# Altium PCB wacky-hat.PcbDoc (part 2 of 2)
Units mm, origin at the board's own origin, x right, y up, seen from the top; angles counter-clockwise.
Board outline 64 x 85 mm, 4 copper layers (Top Layer, Ground Plane, Power Plane, Bottom Layer), stack 0.844 mm thick; 113 components, 70 nets, 320 pads, 108 vias.
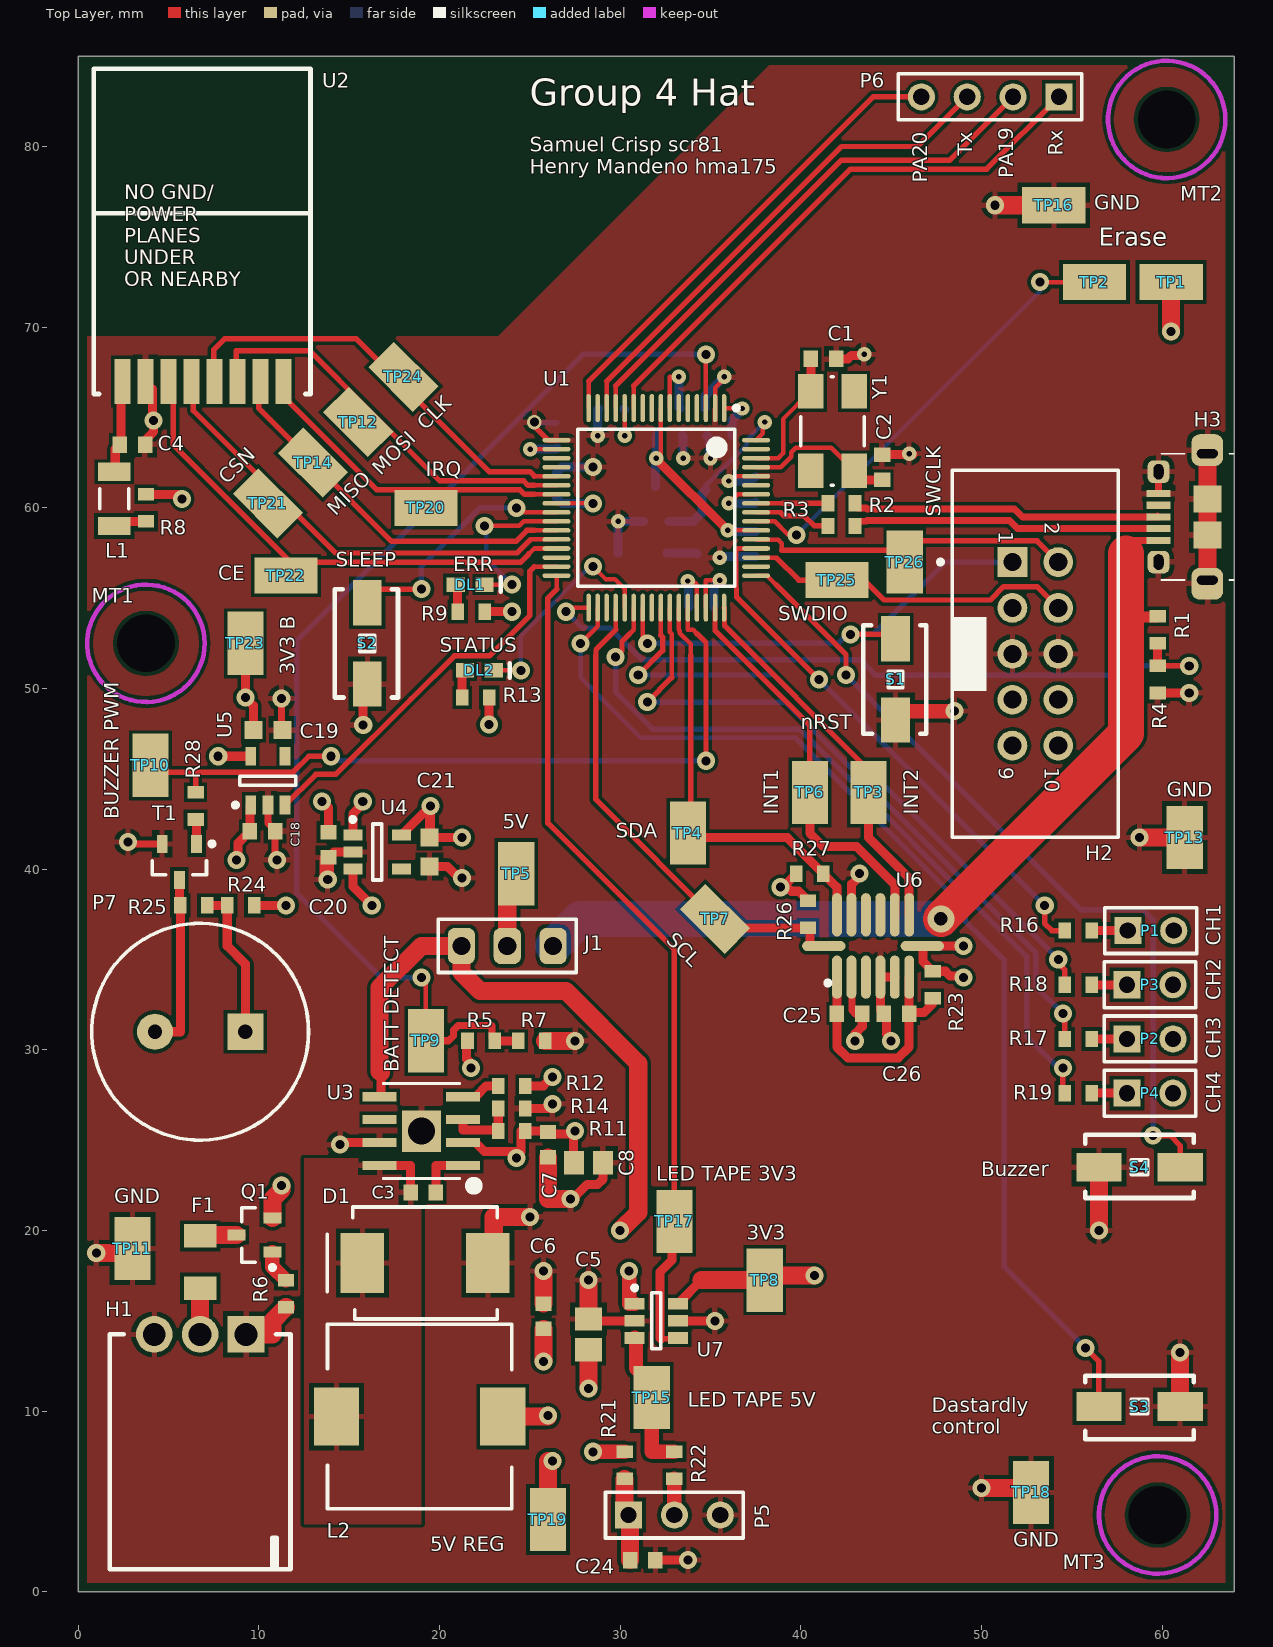
[diagram p0: Top Layer view]

## Via types
v1: diameter 1, hole 0.5, Top Layer to Bottom Layer, 82 vias
v2: diameter 0.8, hole 0.3, Top Layer to Bottom Layer, tented top, 15 vias
v3: diameter 1, hole 0.5, Top Layer to Bottom Layer, tented top, 4 vias
v4: diameter 0.8, hole 0.3, Top Layer to Bottom Layer, 4 vias
v5: diameter 0.8, hole 0.5, Top Layer to Bottom Layer, tented top, 1 vias
v6: diameter 1.5, hole 0.75, Top Layer to Bottom Layer, 1 vias
v7: diameter 2, hole 1.5, Top Layer to Bottom Layer, 1 vias

## Nets (pads, with @x,y where several pads share a name; then routed paths per layer and width w, separated by ;. In a path a pad name is that pad's centre, name@x,y a point inside that pad or via, vN(x,y) a via of type N, cw(c..) or ccw(c..) an arc to the next point about the centre after c; other vN are vias at no path point) (continued)
RADIO_CSN: (continued)
  Top Layer w0.3: U2.4@6,67.25 6.375,66.875 6.375,65.375 14.25,57.5 24.293,57.5 24.818,58.025 24.821,58.025 25.046,58.25
RADIO_IRQ: TP20.1 U1.23 U2.8 | length 18.6
  Top Layer w0.25: 25.25,60.75 U1.23
  Top Layer w0.3: U2.8@11.086,67.25 11.346,66.989 11.346,66.189 16.536,61 24.452,61 24.702,60.75 25.25,60.75
RADIO_MISO: TP14.1 U1.27 U2.7 | length 21.6
  Top Layer w0.25: 25.239,58.75 U1.27
  Top Layer w0.3: U2.7@9.814,67.25 10,67.064 10,65.5 TP14.1 17.35,58.15 24.236,58.15 24.611,58.525 24.614,58.525 24.839,58.75 25.239,58.75
RADIO_MOSI: TP12.1 U1.22 U2.6 | length 22.3
  Top Layer w0.25: 25.25,61.25 U1.22
  Top Layer w0.3: U2.6@8.543,67.25 8.75,67.457 8.75,68.7 12.8,68.7 16.125,65.375 20,61.5 24.659,61.5 24.909,61.25 25.25,61.25
RADIO_PWR_EN: U1.31 U5.3 | length 21.9
  Top Layer w0.25: 25.25,56.75 U1.31
  Top Layer w0.3: U5.3 13.15,45.25 14.255,45.25 18.438,49.432 20.818,51.813 22.765,51.813 25,54.048 25,56.5 25.25,56.75
SLEEP: S2.2 U1.25 | length 13.5
  Top Layer w0.25: v1(24.25,60) 24.453,60 24.703,59.75 U1.25
  Top Layer w0.3: S2.2 16.75,55.5 v1(19,55.5)
  Bottom Layer w0.3: v1(19,55.5) 19,56.75 22.25,60 v1(24.25,60)
SOUND_BUZZER: S4.2 U1.49 | length 45.4
  Top Layer w0.25: U1.49 38.125,56.25 38.625,55.75
  Top Layer w0.3: 38.625,55.75 42.5,51.875 v1(42.5,50.75) ; v1(59.5,25.25) 60.45,25.25 61,24.7 S4.2
  Bottom Layer w0.3: v1(42.5,50.75) 55.503,37.747 58.947,37.747 59.5,37.195 v1(59.5,25.25)
STAT0: DL1.1 U1.26 | length 9.4
  Top Layer w0.25: DL1.1 v1(24,55.75) ; v1(22.5,59) 24.417,59 24.667,59.25 U1.26
  Bottom Layer w0.25: v1(22.5,59) 22.575,58.925 22.575,57.175 v1(24,55.75)
STAT1: DL2.1 U1.37 | length 12.3
  Top Layer w0.25: DL2.1 v1(24.5,51) ; v3(28.5,56.75) 29.191,56.058 29.702,56.058 30.25,55.51 U1.37
  Bottom Layer w0.25: v1(24.5,51) 24.5,52.917 28.333,56.75 v3(28.5,56.75)
SWCLK: H2.2 TP26.1 U1.53 | length 17.9
  Top Layer w0.25: U1.53@37.55,58.225 38.75,58.225 38.947,58.028 38.947,57.65
  Top Layer w0.3: 38.947,57.65 45.541,57.65 46.066,58.175 53.075,58.175 H2.2
SWDIO: H2.4 TP25.1 U1.51 | length 18.5
  Top Layer w0.25: U1.51 37.55,57.225 38.665,57.225
  Top Layer w0.3: 38.665,57.225 39.89,56 TP25.1 43.505,56 44.605,54.9 50.488,54.9 51.223,55.635 53.075,55.635 H2.4
USB_DETECT: R1.1 R4.2 U1.33 | length 40.5
  Top Layer w0.25: v3(27,54.25) 27.225,54.475 U1.33
  Top Layer w0.3: R4.2 v1(61.5,51.25)
  Top Layer w0.5: R4.2 R1.1
  Bottom Layer w0.3: v3(27,54.25) 27.9,53.35 29.448,53.35 31.198,51.6 43.27,51.6 44.125,50.745 57.556,50.745 58.061,51.25 v1(61.5,51.25)
VBUS: H3.1 J1.3 R1.2 | length 51.5
  Top Layer w0.4: 58.25,58 58.45,58.2 H3.1
  Top Layer w0.6: 58,53.25 58.1,53.35 58.7,53.95 59.7,53.95 R1.2 ; 58.25,56.5 58.25,58
  Top Layer w2: v6(47.75,37.25) 58,47.5 58,53.25 ; 58,53.45 58,57.475
  Bottom Layer w2: J1.3 27.79,37.25 v6(47.75,37.25)
pads on no net: H2.3 H2.9 H2.10 H3.4 MT1.1 MT2.1 MT3.1 U1.4 U1.5 U1.6 U1.9 U1.10 U1.15 U1.19 U1.20 U1.30 U1.35 U1.40 U1.50 U1.59 U1.63 U3.6 U4.4 U5.4 U6.3 U6.10 U6.11 Y1.2 Y1.4

## Polygon pours and split planes (outlines as drawn)
GND on Top Layer (solid, pour order 10): 0,85 64,85 64,0 0,0
no net on Top Layer "Top Layer-No Net" (solid, pour order 6): 31,6
no net on Top Layer "Top Layer-No Net 1" (solid, pour order 4): 31,6.25
NetC3_2 on Top Layer "Top Layer-NetC3_2" (solid, pour order 0): 12.5,3.75 19,3.75 19,24 12.5,24
NetC10_2 on Bottom Layer "Bottom Layer-NetC10_2" (solid, pour order 8): 26,64.75 26,58.25 38,58.25 38,65.75 37.5,66.25 27,66.25
GND on Ground Plane (split plane): 63.49,0.51 0.51,0.51 0.51,69.5 23.25,69.5 38.24,84.49 63.49,84.49
5V on Power Plane (split plane): 16.621,44.75 16.621,43.5 16.63,43.45 16.641,43.435 16.63,43.42 16.621,43.371 16.621,39.5 16.63,39.45 16.658,39.408 18.158,37.908 18.2,37.88 18.25,37.871 25.121,37.871 25.121,31.379 24.5,31.379 21,31.379 20.95,31.37 20.908,31.342 19.446,29.879 0.51,29.879 0.51,44.871 16.621,44.871
3V3_B on Power Plane (split plane): 16.621,44.129 0.51,44.129 0.51,68.5 16.621,68.5
3V3 on Power Plane (split plane): 63.49,0.51 35.963,0.51 35.95,0.52 35.9,0.529 35.85,0.52 35.837,0.51 32.129,0.51 32.129,21.25 32.12,21.3 32.092,21.342 32.05,21.37 32,21.379 30.129,21.379 30.129,27 30.129,28.75 30.12,28.8 30.092,28.842 30.05,28.87 30,28.879 27.554,28.879 25.379,31.054 25.379,38 25.37,38.05 25.342,38.092 25.3,38.12 25.25,38.129 18.304,38.129 16.879,39.554 16.879,43.371 16.87,43.42 16.859,43.435 16.87,43.45 16.879,43.5 16.879,44.75 16.879,69.5 23.25,69.5 38.24,84.49 63.49,84.49
BATTERY_IN on Power Plane (split plane): 24.5,31.121 25.121,31.121 25.121,31 25.13,30.95 25.158,30.908 27.408,28.658 27.45,28.63 27.5,28.621 29.871,28.621 29.871,27 29.871,21.379 27,21.379 26.95,21.37 26.908,21.342 11.908,6.342 11.88,6.3 11.871,6.25 11.871,0.51 0.51,0.51 0.51,29.621 19.5,29.621 19.55,29.63 19.592,29.658 21.054,31.121 24.5,31.121
5V_REG on Power Plane (split plane): 31.871,0.51 12.129,0.51 12.129,6.196 27.054,21.121 31.871,21.121

## Other copper
Top Layer:
  pour cut-out: 0,85 0,69.5 23.25,69.5 38.75,85
Bottom Layer:
  pour cut-out: 0,85 0,69.5 23.25,69.5 38.75,85
Ground Plane (plane layer: these items are gaps in the copper):
  pour cut-out: 0,85 0,69.5 23.25,69.5 38.75,85
Power Plane (plane layer: these items are gaps in the copper):
  pour cut-out: 0,85 0,69.5 23.25,69.5 38.75,85
  lines w0.254: 0,45 16.75,45 ; 0,47.75 0.25,48 ; 0,54.25 0,54.5 ; 16.75,43.371 16.75,39.5 18.25,38 25.25,38 25.25,31 27.5,28.75 30,28.75 30,27 30,21.25 ; 16.75,43.5 16.75,44.75 16.75,69.5 ; 25.25,31.25 24.5,31.25 ; 28.25,0 32,0 32,21.25 30,21.25 ; 35.9,0.4 36.3,0 64,0 ; 41,85 64,85 64,33.5 64,29.75 ; 24.5,31.25 24.5,31.25 ; 24.5,31.25 21,31.25 19.5,29.75 0,29.75 0,0 12,0 12,6.25 27,21.25 29,21.25 30,21.25

## Silkscreen, mask and mechanical layers (free items; w line width, h text height)
Top Overlay:
  text "Group 4 Hat" at 25,82.25 h1.5
  text "Tx" at 49.5,79.5 h0.8 r90
  text "Rx" at 54.5,79.5 h0.8 r90
  text "Samuel Crisp scr81 / Henry Mandeno hma175" at 25,78.5 h0.8
  text "PA19" at 51.75,78.25 h0.8 r90
  text "PA20" at 47,78 h0.8 r90
  text "GND" at 56.25,76.5 h0.8
  text "Erase" at 56.5,74.5 h1
  text "CLK" at 19.25,64.25 h0.8 r45
  text "MOSI" at 16.75,61.75 h0.8 r45
  text "IRQ" at 19.25,61.75 h0.8
  text "CSN" at 8.25,61.25 h0.8 r45
  text "MISO" at 14.25,59.5 h0.8 r45
  text "SWCLK" at 47.75,59.5 h0.8 r90
  text "SLEEP" at 14.25,56.75 h0.8
  text "ERR" at 20.75,56.5 h0.8
  text "CE" at 7.75,56 h0.8
  text "SWDIO" at 38.75,53.75 h0.8
  text "STATUS" at 20,52 h0.8
  text "3V3 B" at 12,50.75 h0.8 r90
  text "nRST" at 40,47.75 h0.8
  text "GND" at 60.25,44 h0.8
  text "INT1" at 38.75,43 h0.8 r90
  text "INT2" at 46.5,43 h0.8 r90
  text "BUZZER PWM" at 2.25,42.75 h0.8 r90
  text "5V" at 23.5,42.25 h0.8
  text "SDA" at 29.75,41.75 h0.8
  text "SCL" at 32.5,36 h0.8 r315
  text "CH1" at 63.25,35.75 h0.8 r90
  text "CH2" at 63.25,32.75 h0.8 r90
  text "CH3" at 63.25,29.5 h0.8 r90
  text "BATT DETECT" at 17.75,28.75 h0.8 r90
  text "CH4" at 63.25,26.5 h0.8 r90
  text "Buzzer" at 50,23 h0.8
  text "LED TAPE 3V3" at 32,22.75 h0.8
  text "GND" at 2,21.5 h0.8
  text "3V3" at 37,19.5 h0.8
  text "LED TAPE 5V" at 33.75,10.25 h0.8
  text "Dastardly  / control" at 47.25,8.75 h0.8
  text "GND" at 51.75,2.5 h0.8
  text "5V REG" at 19.5,2.25 h0.8
Bottom Overlay:
  text "Chris Patterson" at 35.75,9.75 h1.52
Board Outline:
  the board outline again, w0.254

## Dimensions
0,85 to 0,0 on Mechanical 1
64,86 to 0,86 on Mechanical 1

## Text inside footprints (layer, text, board x,y; h text height)
H2: Top Overlay "9" at 50.96,45.64 h0.8 r270; Top Overlay "10" at 53.5,45.64 h0.8 r270; Top Overlay "1" at 50.96,58.7 h0.8 r270; Top Overlay "2" at 53.5,59.2 h0.8 r270
H3: Mechanical 1 "PCB Edge" at 64.77,57.35 h0.8 r90
U2: Top Overlay "NO GND/ / POWER / PLANES / UNDER / OR NEARBY" at 2.557,72.275 h0.8
U3: Mechanical 13 "*" at 20.93,24.344 h0.8 r180